# Altium PCB leo_pcb.PcbDoc (part 2 of 2)
Units mm, origin at the board's own origin, x right, y up, seen from the top; angles counter-clockwise.
Board outline 72.5 x 82 mm, 4 copper layers (TOP_Layer, INT1_GND, INT2_GND, BOTTOM_Layer), stack 1.586 mm thick; 90 components, 77 nets, 351 pads, 145 vias.
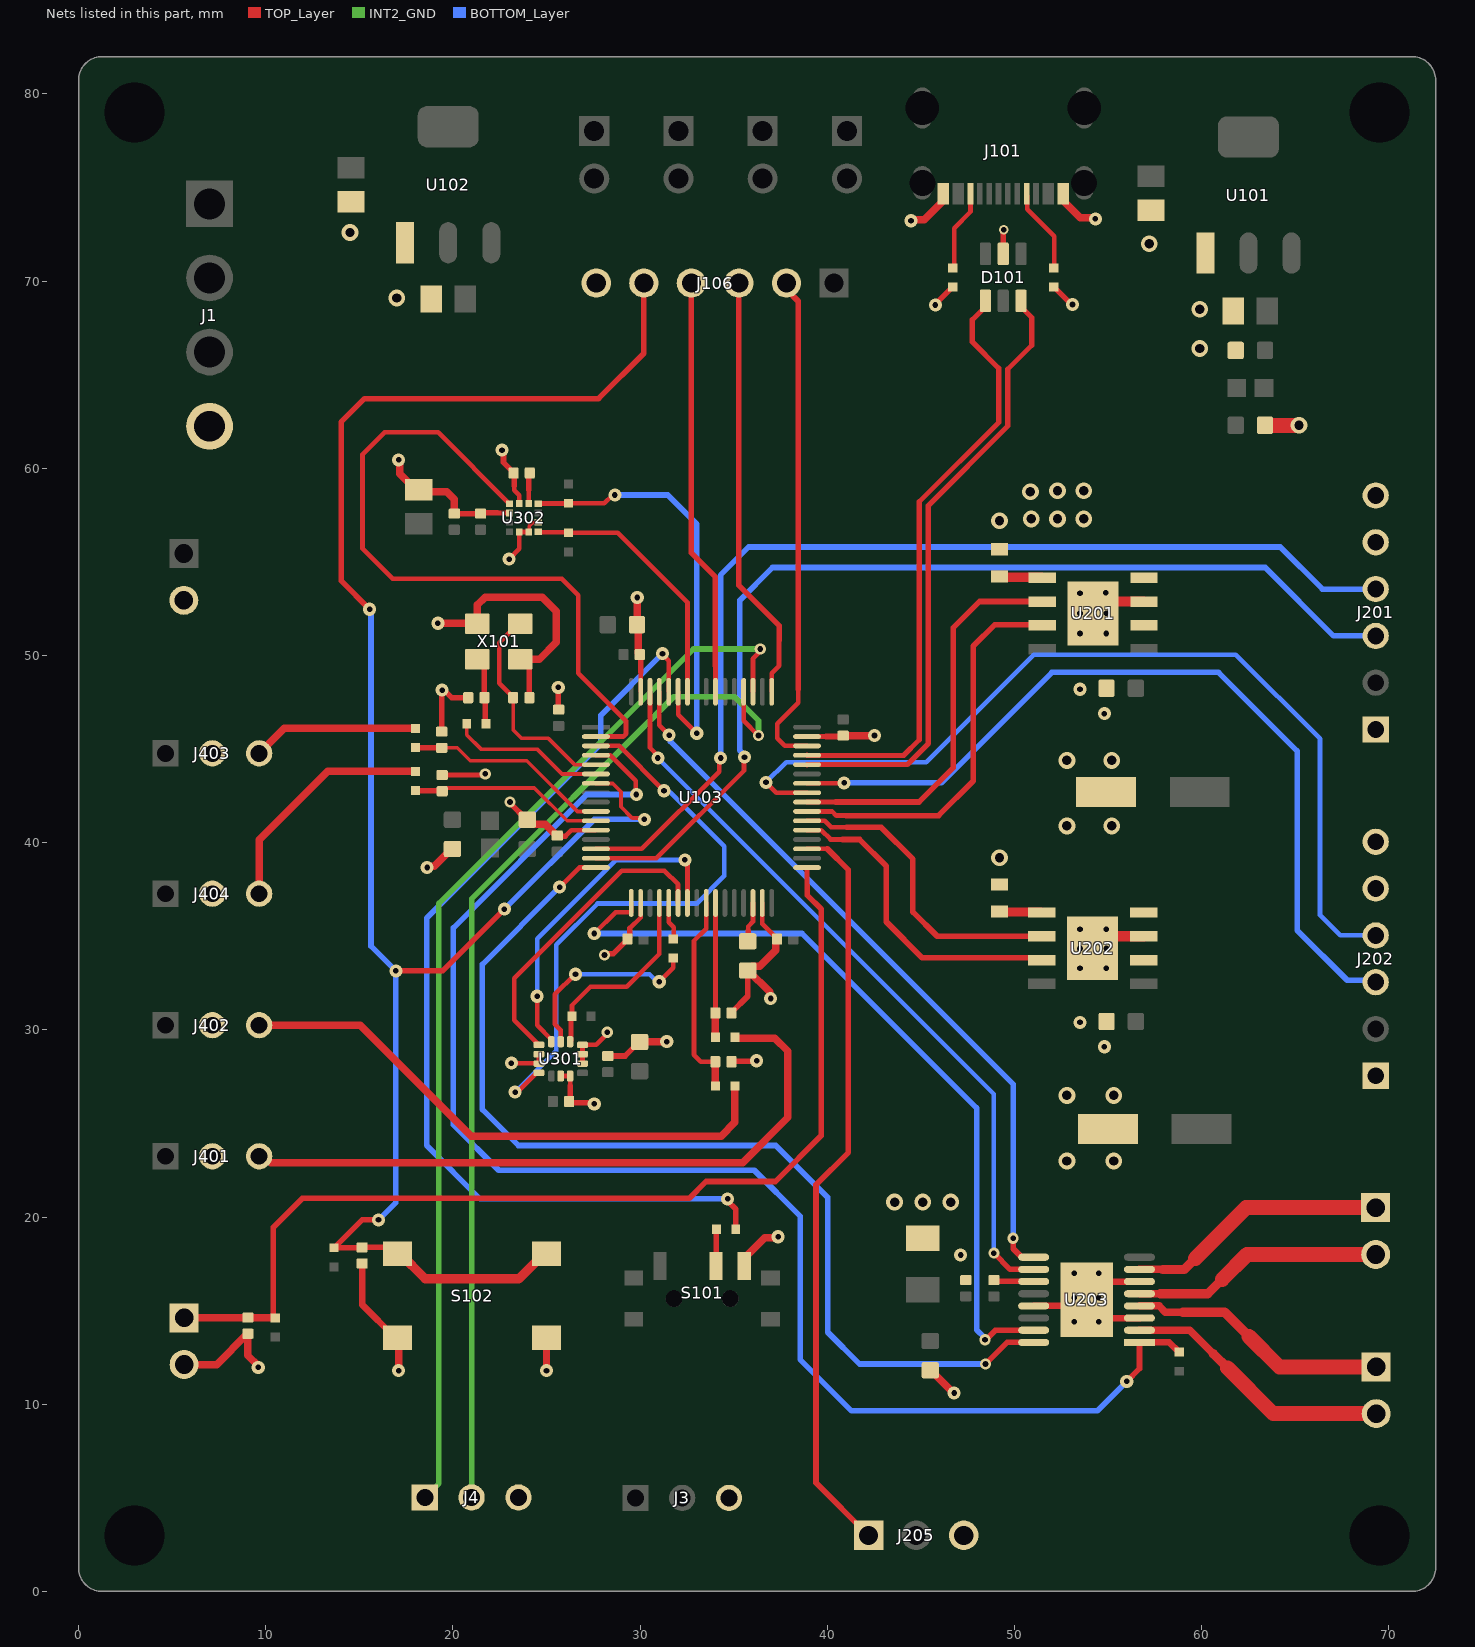
[diagram p4: the nets of this part, all layers, seen from the top]

## Via types
v1: diameter 0.7, hole 0.3, TOP_Layer to BOTTOM_Layer, 73 vias
v2: diameter 0.9, hole 0.5, TOP_Layer to BOTTOM_Layer, 38 vias
v3: diameter 0.6, hole 0.3, TOP_Layer to BOTTOM_Layer, 32 vias
v4: diameter 1, hole 0.6, TOP_Layer to BOTTOM_Layer, 1 vias
v5: diameter 0.5, hole 0.3, TOP_Layer to BOTTOM_Layer, 1 vias

## Nets (pads, with @x,y where several pads share a name; then routed paths per layer and width w, separated by ;. In a path a pad name is that pad's centre, name@x,y a point inside that pad or via, vN(x,y) a via of type N, cw(c..) or ccw(c..) an arc to the next point about the centre after c; other vN are vias at no path point) (continued)
GND: C1.1 C101.1 C102.1 C103.2 C104.2 C105.1 C106.1 C107.1 C108.2 C109.2 C110.1 C111.1 C112.1 C113.1 C114.1 C115.1 C116.1 C117.1 C118.1 C119.1 C201.2 C202.1 C203.2 C204.1 C205.2 C206.1 C208.1 C301.1 C302.1 C303.1 C304.1 C305.1 C306.2 C307.1 C401.1 C402.1 C403.1 C404.1 D101.2 J1.4 J2.2 J3.3 J4.3 J5.2 J101.A1B12 J101.B1A12 J106.6 J201.5 J202.5 J205.3 J401.2 J402.2 J403.2 J404.2 R101.2 R102.2 R201.1 R202.1 S101.3 S102.3 S102.4 U101.1 U102.1 U103.12 U103.18 U103.31 U103.47 U103.63 U201.7 U201.9 U202.7 U202.9 U203.3 U203.6 U203.13 U203.17 U301.2 U301.3 U301.6 U301.7 U301.9 U301.10 U301.11 U302.2 U302.6 U302.8 U302.11 U302.12 X101.2 X101.4 | length 122.5
  TOP_Layer w0.2: U302.12@24.047,56.602 24.072,56.627 24.072,56.913 24.248,57.089 24.535,57.089 U302.2@24.56,57.114
  TOP_Layer w0.25: C403.1@19.4,45.932 C403.1@19.412,45.945 ; v1@19.412,48.138 v1(19.425,48.15) ; C404.1@19.425,43.614 19.43,43.62 21.669,43.62 v3(21.725,43.675) ; 22.375,57.625 22.386,57.614 U302.8@23.035,57.614 ; v1(23,55.15) 23.547,55.697 U302.11@23.547,56.602 U302.12@24.047,56.602 ; v1(23.125,28.225) 23.136,28.214 24.583,28.214 U301.3@24.594,28.203 U301.2@24.594,28.703 ; 23.275,59.075 23.275,58.825 23.547,58.553 U302.6@23.547,58.127 ; U301.6@25.759,27.538 U301.7@26.259,27.538 26.275,27.522 26.275,27.025 ; 26,40.35 26.322,40.672 U103.12@27.639,40.672 ; U301.9@26.924,28.203 U301.10@26.924,28.703 U301.11@26.924,29.203 27.653,29.203 28.25,29.8 v3(28.25,29.875) ; C111.1@29.318,34.85 C111.1@29.45,34.982 ; 29.45,35.425 30.03,36.005 U103.18@30.03,36.78 ; U103.63@30.03,48.063 30.03,49.095 ; U103.31@36.53,36.781 36.53,35.662 C112.1@37.167,35.025 ; U103.47@38.921,45.672 39.947,45.672
  TOP_Layer w0.3: C403.1@19.412,45.945 v1@19.412,48.138 ; v1(19.425,48.15) 19.533,48.15 19.933,47.75 C105.1@20.818,47.75 ; C305.1@20.075,57.582 C304.1@21.475,57.582 21.518,57.625 22.375,57.625 ; v1(22.625,60.975) 22.702,60.898 22.702,60.321 23.243,59.78 C307.1@23.243,59.75 23.275,59.718 23.275,59.075 ; v3(23.05,42.175) 23.05,42.125 23.945,41.23 C118.1@23.975,41.23 ; X101.2@23.6,49.8 23.682,49.8 24.082,49.4 C106.1@24.082,47.75 ; C117.1@25.575,40.382 25.607,40.35 26,40.35 ; v1(25.625,48.3) 25.638,48.287 25.638,47.12 C110.1@25.65,47.107 ; 26.275,27.025 26.275,26.243 C303.1@26.207,26.175 26.27,26.113 27.487,26.113 v1(27.55,26.05) ; v3(28.1,34) 28.177,34.077 28.575,34.077 29.318,34.82 C111.1@29.318,34.85 ; C301.1@28.275,28.607 29.197,28.607 29.945,29.355 C302.1@29.975,29.355 ; C111.1@29.45,34.982 29.45,35.425 ; C114.1@29.982,50.05 30.03,50.002 30.03,49.095 ; C402.1@34.882,28.3 34.907,28.325 36.2,28.325 v1(36.225,28.35) ; C401.1@34.882,30.9 34.882,30.93 35.75,31.798 C116.1@35.75,33.17 ; 39.947,45.672 40.804,45.672 C113.1@40.85,45.718 C113.1@40.853,45.722 ; v1(45.775,68.725) 45.775,68.775 46.687,69.688 R101.2@46.7,69.688 ; D101.2@49.4,71.455 49.409,71.464 49.409,72.734 v5(49.419,72.744) ; R102.2@52.1,69.688 52.112,69.688 53.05,68.75 v1(53.1,68.75)
  TOP_Layer w0.35: C107.1@15.15,17.518 15.15,15.325 16.925,13.55 S102.3@17.05,13.55 ; U203.13@51.028,15.257 53.528,15.257 U203.17@53.853,15.582 ; U203.3@56.678,14.607 54.828,14.607 U203.17@53.853,15.582 ; U203.6@56.678,16.557 54.828,16.557 U203.17@53.853,15.582
  TOP_Layer w0.4: J5.2@5.642,12.121 7.373,12.121 9.02,13.768 C1.1@9.05,13.768 9.05,12.606 9.6,12.056 v1(9.6,11.975) ; S102.3@17.05,13.55 17.1,13.5 v1(17.1,11.8) ; v1(17.1,60.45) 17.157,60.393 17.157,59.718 18.025,58.85 C306.2@18.175,58.85 18.275,58.75 19.675,58.75 20.075,58.35 C305.1@20.075,57.582 ; v1(18.625,38.675) 18.682,38.732 19.007,38.732 19.945,39.67 C119.1@19.975,39.67 ; v1(19.2,51.725) 19.212,51.713 21.288,51.713 X101.4@21.3,51.7 21.3,52.7 21.725,53.125 24.775,53.125 25.525,52.375 25.525,50.7 24.625,49.8 X101.2@23.682,49.8 ; C118.1@23.975,41.23 24.21,40.995 24.932,40.995 25.545,40.382 C117.1@25.575,40.382 ; v1(25,11.8) S102.4@25,13.55 ; v1(29.85,53.1) 29.84,53.09 29.84,51.66 C115.1@29.83,51.65 29.912,51.568 29.912,50.12 C114.1@29.982,50.05 ; C302.1@29.975,29.355 29.985,29.365 31.415,29.365 v1(31.425,29.375) ; S101.3@35.565,17.393 35.565,17.793 36.665,18.893 37.318,18.893 v1(37.375,18.95) ; v1(36.975,31.675) 36.918,31.732 36.918,32.032 35.78,33.17 C116.1@35.75,33.17 35.982,33.402 36.402,33.402 37.248,34.248 37.248,34.78 C112.1@37.318,34.85 ; C113.1@40.853,45.722 42.521,45.722 v1(42.525,45.725) ; v1(44.475,73.225) 44.532,73.282 45.182,73.282 46.2,74.3 J101.B1A12@46.2,74.575 ; C208.1@45.5,11.82 45.53,11.82 46.75,10.6 v1(46.775,10.6) ; J101.A1B12@52.6,74.575 52.6,74.3 53.518,73.382 54.268,73.382 v1(54.325,73.325)
  TOP_Layer w0.55: U202.9@54.178,34.368 54.813,35.003 U202.7@56.902,35.003 ; U201.9@54.2,52.25 54.835,52.885 U201.7@56.924,52.885
  TOP_Layer w0.8: C101.1@63.38,62.3 v2(65.2,62.3)
  other v1: 47.125,17.975 54.8,29.1 53.5,30.4 54.8,46.9 53.5,48.2
  other v2: 43.6,20.8 45.1,20.8 46.6,20.8 52.8,23 55.3,23 52.8,26.5 55.3,26.5 49.2,39.2 52.8,40.9 55.2,40.9 52.8,44.4 55.2,44.4 49.2,57.2 50.9,57.3 52.3,57.3 53.7,57.3 50.85,58.75 52.3,58.8 53.7,58.8 59.9,66.4 59.9,68.5 17,69.1 57.2,72 14.5,72.6
  other v3: 53.2,14.4 54.5,14.4 53.2,15.7 54.5,15.7 53.2,17 54.5,17 53.5,33.3 54.9,33.3 53.5,34.35 54.9,34.35 53.5,35.375 54.9,35.375 53.5,51.175 54.9,51.175 53.5,52.25 54.9,52.25 53.5,53.325 54.875,53.35
ICM_INT: U103.3 U301.4 | length 31.6
  TOP_Layer w0.25: v1(23.325,26.675) 23.446,26.675 24.474,27.703 U301.4@24.594,27.703 ; U103.3@27.639,45.172 28.878,45.172 v1(31.275,42.775)
  BOTTOM_Layer w0.25: v1(23.325,26.675) 25.525,28.875 25.525,34.55 27.725,36.75 33.025,36.75 34.5,38.225 34.5,39.8 31.611,42.689 31.361,42.689 v1(31.275,42.775)
ICM_MISO: U103.22 U301.1 | length 16.5
  TOP_Layer w0.25: U301.1@24.594,29.203 23.275,30.522 23.275,32.75 29.025,38.5 31.3,38.5 32.03,37.77 U103.22@32.03,36.781
ICM_MOSI: U103.23 U301.14 | length 17.8
  TOP_Layer w0.25: v1(24.5,31.8) 24.5,30.247 25.259,29.488 U301.14@25.259,29.368 ; v1(32.389,39.086) 32.389,38.964 32.53,38.823 U103.23@32.53,36.781
  BOTTOM_Layer w0.25: v1(24.5,31.8) 24.5,34.875 28.7,39.075 32.379,39.075 v1(32.389,39.086)
ICM_NCS: R301.1 U103.20 U301.12 | length 10.5
  TOP_Layer w0.25: U301.12@26.259,29.368 26.309,29.418 26.309,30.671 R301.1@26.363,30.725 26.363,31.313 27.35,32.3 29.275,32.3 31.03,34.055 U103.20@31.03,36.781
ICM_SCLK: R106.2 U301.13 | length 10.4
  TOP_Layer w0.25: U301.13@25.759,29.368 25.759,29.991 25.45,30.3 25.45,31.9 26.525,32.975 v1(26.55,32.975) ; v1(31.025,32.575) 31.775,33.325 R106.2@31.775,33.838
  BOTTOM_Layer w0.25: v1(26.55,32.975) 30.503,32.975 30.903,32.575 v1(31.025,32.575)
ICM_SCLK_R: R106.1 U103.21 | length 2
  TOP_Layer w0.25: U103.21@31.53,36.781 31.53,35.745 31.8,35.475 31.8,34.887 R106.1@31.775,34.862
LDM_CURR_SEN: R201.2 U201.1 | length 2.3
  TOP_Layer w0.5: R201.2@49.2,54.225 49.241,54.184 51.446,54.184 U201.1@51.476,54.155
LDM_ENC_CHA: J201.4 U103.14 | length 55.4
  TOP_Layer w0.25: U103.14@27.639,39.672 30.097,39.672 34.225,43.8 34.225,44.45 v1(34.3,44.525)
  BOTTOM_Layer w0.3: v1(34.3,44.525) 34.3,54.3 35.8,55.8 64.2,55.8 66.45,53.55 J201.4@69.3,53.55
LDM_ENC_CHB: J201.3 U103.15 | length 55.3
  TOP_Layer w0.25: U103.15@27.639,39.172 30.872,39.172 35.55,43.85 35.55,44.55 v1(35.575,44.575)
  BOTTOM_Layer w0.3: v1(35.575,44.575) 35.575,44.683 35.325,44.933 35.325,52.95 37.075,54.7 63.4,54.7 67.05,51.05 J201.3@69.3,51.05
LDM_N: J201.6 U201.8
LDM_P: J201.1 U201.6
LDM_PWM_INA: U103.39 U201.3 | length 21.1
  TOP_Layer w0.25: U103.39@38.921,41.672 40.253,41.672 40.475,41.45 41,41.45
  TOP_Layer w0.3: 41,41.45 45.95,41.45 47.8,43.3 47.8,50.5 48.95,51.65 51.441,51.65 U201.3@51.476,51.615
LDM_PWM_INB: U103.40 U201.2 | length 21.4
  TOP_Layer w0.25: U103.40@38.921,42.172 40.447,42.172 40.45,42.175
  TOP_Layer w0.3: 40.45,42.175 44.9,42.175 46.725,44 46.725,51.475 48.135,52.885 U201.2@51.476,52.885
LSBM_N: J203.1 U203.4 | length 14
  TOP_Layer w0.35: U203.4@56.678,15.257 U203.4@56.684,15.251
  TOP_Layer w0.4: U203.4@56.684,15.251 57.724,15.251 58.05,14.925 59,14.925
  TOP_Layer w0.5: 59,14.925 61.225,14.925 62.525,13.625
  TOP_Layer w0.8: 62.525,13.625 64.15,12 J203.1@69.325,12
LSBM_P: J203.2 U203.2 | length 14.5
  TOP_Layer w0.4: U203.2@56.678,13.957 59.368,13.957 60.625,12.7
  TOP_Layer w0.5: 60.625,12.7 61.375,11.95
  TOP_Layer w0.8: 61.375,11.95 63.825,9.5 J203.2@69.325,9.5
LSBM_PWM_INA: U103.16 U203.16 | length 55.7
  TOP_Layer w0.25: v1(25.7,37.625) 26.747,38.672 U103.16@27.639,38.672
  TOP_Layer w0.3: v3(48.45,12.15) 49.607,13.307 U203.16@51.028,13.307
  BOTTOM_Layer w0.3: v1(25.7,37.625) 21.575,33.5 21.575,25.75 23.5,23.825 37.25,23.825 40.025,21.05 40.025,13.85 41.725,12.15 v3(48.45,12.15)
LSBM_PWM_INB: U103.17 U203.15 | length 42.6
  TOP_Layer w0.25: v1(27.55,35.15) 28.688,36.288 29.529,36.288 29.53,36.289 U103.17@29.53,36.781
  TOP_Layer w0.3: v3(48.425,13.45) 48.472,13.45 48.979,13.957 U203.15@51.028,13.957
  BOTTOM_Layer w0.3: v1(27.55,35.15) 38.65,35.15 47.975,25.825 47.975,13.981 48.425,13.531 v3(48.425,13.45)
MAG_C1: C307.2 U302.5 | length 1.6
  TOP_Layer w0.25: U302.5@24.047,58.127 24.047,58.847 24.05,58.85
  TOP_Layer w0.3: 24.05,58.85 24.05,59.693 C307.2@24.107,59.75
MAG_INT: U103.2 U302.7 | length 37.7
  TOP_Layer w0.25: U302.7@23.035,58.114 23.022,58.114 19.211,61.925 16.35,61.925 15.175,60.75 15.175,55.7 16.775,54.1 25.825,54.1 26.7,53.225 26.7,49.05 29.25,46.5 29.25,45.818 29.104,45.672 U103.2@27.639,45.672
MAG_SCL: R303.1 U103.58 U302.1 | length 14.3
  TOP_Layer w0.25: U302.1@24.56,56.614 24.586,56.588 26.149,56.588 R303.1@26.175,56.562 28.813,56.562 32.53,52.845 U103.58@32.53,48.063
MAG_SDA: R302.1 U103.59 U302.4 | length 23.1
  TOP_Layer w0.25: U302.4@24.56,58.114 24.572,58.126 26.163,58.126 R302.1@26.175,58.138 28.091,58.138 28.528,58.575 v1(28.65,58.575) ; U103.59@32.03,48.063 32.03,46.845 v1(33.025,45.85)
  BOTTOM_Layer w0.3: v1(28.65,58.575) 31.475,58.575 33.025,57.025 v1(33.025,45.85)
MCU_BOOT0: R103.2 U103.60 | length 52.7
  TOP_Layer w0.25: v1(31.2,50.1) 31.2,50.058 31.53,49.729 U103.60@31.53,48.063
  TOP_Layer w0.3: v1(34.675,20.975) 34.675,20.867 35.112,20.43 R103.2@35.112,19.35
  BOTTOM_Layer w0.3: v1(31.2,50.1) 27.9,46.8 27.9,45.275 18.6,35.975 18.6,23.825 21.45,20.975 v1(34.675,20.975)
MCU_BOOT0_R: R103.1 S101.2 | length 2
  TOP_Layer w0.3: S101.2@34.065,17.393 34.076,17.405 34.076,19.339 R103.1@34.088,19.35
MCU_NRST: C107.2 J106.5 R105.1 S102.1 S102.2 U103.7 | length 101.7
  TOP_Layer w0.2: U103.7@27.639,43.172 27.649,43.162 28.538,43.162 28.975,42.725 28.975,41.925 29.575,41.325 30.15,41.325 v1(30.225,41.25)
  TOP_Layer w0.3: R105.1@13.65,18.362 13.662,18.362 R105.1@13.672,18.372 ; v1(15.55,52.475) 14.025,54 14.025,62.475 15.275,63.725 27.775,63.725 30.2,66.15 J106.5@30.2,69.9 ; v1(16.025,19.85) 15.15,19.85 R105.1@13.672,18.372 ; v1(16.95,33.15) 19.45,33.15 v1(22.75,36.45) ; S102.1@17.05,18.05 16.718,18.382 C107.2@15.15,18.382 15.14,18.372 R105.1@13.672,18.372
  TOP_Layer w0.5: S102.1@17.05,18.05 17.175,18.05 18.525,16.7 23.525,16.7 24.875,18.05 S102.2@25,18.05
  BOTTOM_Layer w0.3: v1(15.55,52.475) 15.625,52.4 15.625,34.475 v1(16.95,33.15) 16.95,20.775 v1(16.025,19.85) ; v1(22.75,36.45) 27.55,41.25 v1(30.225,41.25)
MCU_OSC_IN: C106.2 U103.5 X101.3 | length 11.7
  TOP_Layer w0.2: C106.2@23.218,47.75 23.218,46.032 23.675,45.575 25.1,45.575 26.503,44.172 U103.5@27.639,44.172
  TOP_Layer w0.25: C106.2@23.218,47.75 23.218,47.78 22.475,48.523 22.475,50.675 23.5,51.7 X101.3@23.6,51.7
MCU_OSC_OUT: R104.2 U103.6 | length 8.4
  TOP_Layer w0.2: R104.2@20.738,46.35 20.738,45.762 21.5,45 24.5,45 25.828,43.672 U103.6@27.639,43.672
MCU_RX: J4.2 U103.52 | length 55.8
  TOP_Layer w0.25: U103.52@35.53,48.063 35.53,46.52 v3(36.325,45.725)
  INT2_GND w0.3: J4.2@21,5.025 21,37 31.8,47.8 35.05,47.8 36.325,46.525 v3(36.325,45.725)
MCU_SWCLK: J106.3 U103.49 | length 22.9
  TOP_Layer w0.25: U103.49@37.03,48.063 37.03,49.055 37.425,49.45 37.425,50.8
  TOP_Layer w0.3: J106.3@35.28,69.9 35.28,53.745 37.425,51.6 37.425,50.8
MCU_SWDIO: J106.2 U103.46 | length 26.8
  TOP_Layer w0.25: 38.45,48.207 38.45,47.475 37.325,46.35 37.325,45.575 37.728,45.172 U103.46@38.921,45.172
  TOP_Layer w0.3: J106.2@37.82,69.9 37.82,69.556 38.45,68.926 38.45,48.207
MCU_SWO: J106.4 U103.55 | length 22.4
  TOP_Layer w0.25: 34.025,49.45 34.03,49.445 U103.55@34.03,48.063
  TOP_Layer w0.3: J106.4@32.74,69.9 32.74,55.485 34.025,54.2 34.025,49.45
MCU_TX: J4.1 U103.51 | length 57.3
  TOP_Layer w0.25: U103.51@36.03,48.063 36.03,49.826 36.425,50.221 v3(36.425,50.35)
  INT2_GND w0.3: J4.1@18.5,5.025 19.25,5.775 19.25,36.75 32.85,50.35 v3(36.425,50.35)
MCU_VCAP_1: C116.2 U103.30 | length 2.2
  TOP_Layer w0.25: 35.775,35.3 35.775,35.525 36.03,35.78 U103.30@36.03,36.781
  TOP_Layer w0.3: C116.2@35.775,34.755 35.775,35.3
  TOP_Layer w0.4: C116.2@35.75,34.73 C116.2@35.775,34.755
RDM_CURR_SEN: R202.2 U202.1 | length 2.3
  TOP_Layer w0.5: R202.2@49.2,36.325 49.226,36.299 51.428,36.299 U202.1@51.454,36.273
RDM_ENC_CHA: J202.4 U103.41 | length 49.6
  TOP_Layer w0.25: v1(36.725,43.225) 37.278,42.672 U103.41@38.921,42.672
  BOTTOM_Layer w0.25: v1(36.725,43.225) 37.8,44.3 45.275,44.3 51.025,50.05 61.825,50.05 66.325,45.55 66.325,36.125 67.4,35.05 J202.4@69.3,35.05
RDM_ENC_CHB: J202.3 U103.42 | length 45.3
  TOP_Layer w0.25: U103.42@38.922,43.172 40.872,43.172 v1(40.9,43.2)
  BOTTOM_Layer w0.3: v1(40.9,43.2) 46.1,43.2 52,49.1 60.9,49.1 65.1,44.9 65.1,35.325 67.775,32.65 69.2,32.65 J202.3@69.3,32.55
RDM_N: J202.6 U202.8
RDM_P: J202.1 U202.6
RDM_PWM_INA: U103.37 U202.3 | length 17.1
  TOP_Layer w0.25: U103.37@38.921,40.672 39.678,40.672 40.175,40.175 40.825,40.175
  TOP_Layer w0.3: 40.825,40.175 41.725,40.175 43.15,38.75 43.15,35.775 45.075,33.85 51.337,33.85 U202.3@51.454,33.733
RDM_PWM_INB: U103.38 U202.2 | length 16.7
  TOP_Layer w0.25: U103.38@38.921,41.172 39.853,41.172 40.2,40.825 41.025,40.825
  TOP_Layer w0.3: 41.025,40.825 42.875,40.825 44.575,39.125 44.575,36.3 45.872,35.003 U202.2@51.454,35.003
RSBM_N: J204.2 U203.5 | length 13.5
  TOP_Layer w0.35: U203.5@56.678,15.907 U203.5@56.684,15.901 ; 57.799,15.901 57.8,15.9
  TOP_Layer w0.4: U203.5@56.684,15.901 57.799,15.901
  TOP_Layer w0.5: 57.8,15.9 60.325,15.9 61.1,16.675
  TOP_Layer w0.8: 61.1,16.675 62.425,18 J204.2@69.3,18
RSBM_P: J204.1 U203.7 | length 14
  TOP_Layer w0.35: 57.918,17.207 57.925,17.2
  TOP_Layer w0.4: U203.7@56.678,17.207 57.918,17.207
  TOP_Layer w0.5: 57.925,17.2 59.075,17.2 59.675,17.8
  TOP_Layer w0.8: 59.675,17.8 62.375,20.5 J204.1@69.3,20.5
RSBM_PWM_INA: U103.61 U203.9 | length 38.9
  TOP_Layer w0.25: U103.61@31.03,48.063 31.03,46.27 v1(31.55,45.75)
  TOP_Layer w0.3: v3(49.925,18.875) 49.937,18.863 49.937,18.31 50.39,17.857 U203.9@51.028,17.857
  BOTTOM_Layer w0.3: v1(31.55,45.75) 31.627,45.673 31.627,45.398 49.925,27.1 v3(49.925,18.875)
RSBM_PWM_INB: U103.62 U203.10 | length 40.1
  TOP_Layer w0.25: U103.62@30.53,48.063 30.53,45.067 30.95,44.647 v1(30.95,44.525)
  TOP_Layer w0.3: v3(48.9,18.075) 49.768,17.207 U203.10@51.028,17.207
  BOTTOM_Layer w0.25: v1(30.95,44.525) 48.9,26.575 v3(48.9,18.075)
SBM_MD_VVP: C207.1 U203.11 | length 2.2
  TOP_Layer w0.3: C207.1@48.9,16.632 48.96,16.572 51.012,16.572 U203.11@51.028,16.557
SBM_NSLEEP: R203.1 U103.4 U203.1 | length 78.8
  TOP_Layer w0.25: U103.4@27.639,44.672 28.395,44.672 29.767,43.3 29.767,42.608 v1(29.8,42.575)
  TOP_Layer w0.3: v1(56,11.225) 56.678,11.903 U203.1@56.678,13.307
  TOP_Layer w0.35: U203.1@56.678,13.307 58.267,13.307 58.787,12.787 R203.1@58.8,12.787
  BOTTOM_Layer w0.3: v1(29.8,42.575) 27.15,42.575 20.025,35.45 20.025,24.925 22.45,22.5 36.1,22.5 38.55,20.05 38.55,12.4 41.3,9.65 54.425,9.65 v1(56,11.225)
SIR_FILT_OUT1: C401.2 R401.2 U103.26 | length 7.2
  TOP_Layer w0.25: C401.2@34.018,30.9 34.03,30.912 U103.26@34.03,36.781
  TOP_Layer w0.4: C401.2@34.018,30.9 34.028,30.89 34.028,29.61 R401.2@34.038,29.6
SIR_FILT_OUT2: C402.2 R402.2 U103.25 | length 11
  TOP_Layer w0.25: U103.25@33.53,36.781 33.53,35.405 32.875,34.75 32.875,28.675 33.25,28.3 C402.2@34.018,28.3
  TOP_Layer w0.4: C402.2@34.018,28.3 34.028,28.29 34.028,27.01 R402.2@34.038,27
SIR_FILT_OUT3: C403.2 R403.2 U103.10 | length 11.1
  TOP_Layer w0.2: C403.2@19.4,45.068 20.232,45.068 20.925,44.375 23.95,44.375 26.653,41.672 U103.10@27.639,41.672
  TOP_Layer w0.3: R403.2@18,45.088 18.01,45.078 19.39,45.078 C403.2@19.4,45.068
SIR_FILT_OUT4: C404.2 R404.2 U103.11 | length 10.5
  TOP_Layer w0.2: C404.2@19.425,42.75 19.595,42.92 19.737,42.92 19.742,42.925 24.35,42.925 26.103,41.172 U103.11@27.639,41.172
  TOP_Layer w0.3: R404.2@18,42.788 18.019,42.769 19.406,42.769 C404.2@19.425,42.75
SIR_OUT1: J401.3 R401.1 | length 36.1
  TOP_Layer w0.4: J401.3@9.65,23.25 9.921,23.25 10.271,22.9 35.475,22.9 37.9,25.325 37.9,28.85 37.2,29.55 35.1,29.55 35.062,29.588 R401.1@35.062,29.6
SIR_OUT2: J402.3 R402.1 | length 30.1
  TOP_Layer w0.4: J402.3@9.65,30.25 15.05,30.25 20.975,24.325 34.325,24.325 35.062,25.062 R402.1@35.062,27
SIR_OUT3: J403.3 R403.1 | length 8.9
  TOP_Layer w0.4: J403.3@9.65,44.775 10.987,46.112 R403.1@18,46.112
SIR_OUT4: J404.3 R404.1 | length 12.7
  TOP_Layer w0.4: J404.3@9.65,37.275 9.65,40.15 13.312,43.812 R404.1@18,43.812
SW_MAIN: C1.2 J5.1 R1.1 U103.33 | length 55.7
  TOP_Layer w0.25: U103.33@38.921,38.672 38.921,37.729 38.925,37.725
  TOP_Layer w0.3: R1.1@10.5,14.612 10.487,14.612 10.477,14.622 10.4,14.7 10.4,19.45 11.95,21 32.625,21 33.525,21.9 37.225,21.9 39.675,24.35 39.675,36.45 38.925,37.2 38.925,37.725
  TOP_Layer w0.4: J5.1@5.642,14.621 5.653,14.632 C1.2@9.05,14.632 9.06,14.622 R1.1@10.477,14.622
USB_CC1: J101.A5 R102.1 | length 4.5
  TOP_Layer w0.25: J101.A5@50.65,74.575 50.675,74.55 50.675,73.85 52.125,72.4 52.125,70.737 R102.1@52.1,70.712
USB_CC2: J101.B5 R101.1 | length 4.3
  TOP_Layer w0.25: R101.1@46.7,70.712 46.775,70.787 46.775,72.825 47.65,73.7 J101.B5@47.65,74.575
USB_D_N: D101.6 U103.44 | length 33.1
  TOP_Layer w0.281: U103.44@38.921,44.172 38.929,44.18 44.28,44.18 45.4,45.299 45.4,58.015 49.642,62.257 49.642,65.292 50.925,66.575 50.925,68.06 50.35,68.635 D101.6@50.35,68.945
USB_D_P: D101.4 U103.45 | length 32.4
  TOP_Layer w0.281: U103.45@38.921,44.672 38.929,44.664 44.08,44.664 44.916,45.5 44.916,58.216 49.158,62.458 49.158,65.342 47.75,66.75 47.75,67.935 48.45,68.635 D101.4@48.45,68.945
VM_PWM: J205.1 U103.35 | length 40.1
  TOP_Layer w0.25: U103.35@38.921,39.672 39.997,39.672 40,39.675
  TOP_Layer w0.3: 40,39.675 41.125,38.55 41.125,23.45 39.4,21.725 39.4,5.81 J205.1@42.21,3
XTAL_IN: C105.2 R104.1 X101.1 | length 3.6
  TOP_Layer w0.3: X101.1@21.3,49.8 21.682,49.418 C105.2@21.682,47.75 21.722,47.71 21.722,46.39 R104.1@21.762,46.35
pads on no net: J101.A8 J101.B8 J101.S1 J101.S2 J101.S3 J101.S4 J205.2 S101. S101.SH1 S101.SH2 S101.SH3 S101.SH4 U103.8 U103.9 U103.24 U103.27 U103.34 U103.36 U103.43 U103.50 U103.53 U103.54 U103.56 U103.57 U203.8

## Polygon pours and split planes (outlines as drawn)
+3V3_USB on TOP_Layer "+3V3_USB_L01_P017" (solid, pour order 17): 60.5,75 61.9,73.6 61.9,70.4 63.1,70.4 63.1,73.9 64.4,75.2 64.4,78.85 63.55,79.7 56.9,79.7 56.5,79.3 56.5,75
+5V_VBUS on TOP_Layer "+5V_VBUS_L01_P023" (solid, pour order 23): 49.1,69.55 49.7,69.55 49.7,68.1 50.15,67.65 50.15,66.8 49.8,66.45 48.975,66.45 48.65,66.775 48.65,67.725 49.1,68.175
+5V_EXT on TOP_Layer "+5V_EXT_L01_P019" (solid, pour order 19): 21.5,73.2 21.5,70.6 20.8,69.9 20,69.9 20,66.8 23.7,66.8 24.5,67.6 24.5,70.2 22.6,72.1 22.6,73.2
GND on TOP_Layer "GND_L01_P004" (solid, pour order 4): 48.6,55.3 52.15,55.3 52.825,54.625 52.825,49.275 51.2,47.65 51.2,42.925 49.425,41.15 48,41.15 47.35,40.5 47.35,38.325 48.3,37.375 52.1,37.375 52.775,36.7 52.775,31.4 51.375,30 51.375,25.05 49.675,23.35 43.45,23.35 42.275,22.175 42.275,18.8 42.95,18.125 46.25,18.125 46.85,17.525 46.85,16.575 47.075,16.35 47.7,16.35 47.975,16.625 47.975,18.85 48.675,19.55 51.3,19.55 52.425,18.425 52.425,13.475 55.275,13.475 55.275,20.45 56.775,21.95 56.775,26.175 55.375,27.575 55.375,32 55.575,32.2 55.575,38.675 56.7,39.8 56.7,44.275 55.4,45.575 55.4,50.175 55.6,50.375 55.6,58.4 54,60 49,60 48.1,59.1 48.1,55.8
+5V_VBUS on TOP_Layer "+5V_VBUS_L01_P018" (solid, pour order 18): 62.4,64.8 62.4,61.9 61.9,61.4 59.5,61.4 58.9,62 58.9,64.2 59.5,64.8
+5V_USB on TOP_Layer "+5V_USB_L01_P016" (solid, pour order 16): 62.9,69.2 62.9,64.9 62.8,64.8 62.8,63.8 64.5,63.8 65.4,64.7 65.4,72.6 64.3,72.6 64.3,70.5
GND on TOP_Layer "GND_L01_P014" (solid, pour order 14): 56.6,74.4 58.3,74.4 58.6,74.1 58.6,73.2 59.1,72.7 60.6,72.7 60.8,72.5 60.8,69.7 61.3,69.2 62.3,69.2 62.3,65.9 62.1,65.7 59.1,65.7 58.3,66.5 56.6,68.2
GND on TOP_Layer "GND_L01_P011" (solid, pour order 11): 13.8,74.9 15.5,74.9 16,74.4 16,73.6 16.4,73.2 18,73.2 18,70.5 18.6,69.9 19.5,69.9 19.5,68.1 15.7,68.1 13.8,70
+3V3_EXT on TOP_Layer "+3V3_EXT_L01_P010" (solid, pour order 10): 13.7,75.4 17.9,75.4 19.2,74.1 19.2,70.9 20.3,70.9 20.3,74.2 21.8,75.7 21.8,79.2 21.125,79.875 14.775,79.875 13.7,78.8
+5V_VBUS on TOP_Layer "+5V_VBUS_L01_P009" (solid, pour order 9): 47.25,74 47.25,75.825 47.95,76.525 50.975,76.525 51.55,75.95 51.55,74 52.05,74 52.05,76.85 51.35,77.55 47.65,77.55 46.75,76.65 46.75,74
+6V_EXT on TOP_Layer "+6V_EXT_L01_P002" (solid, pour order 2): 51.85,16.1 46.8,16.1 46.025,17.025 41.925,17.025 41.3,16.4 41.3,14.6 42.1,13.8 44.3,13.8 45.9,15.4 49.775,15.4 50.1,15.725 51.85,15.725
RDM_P on TOP_Layer "RDM_P_L01_P008" (solid, pour order 8): 56.175,34.1 62.25,34.1 67.8,28.55 70.5,28.55 71.225,27.825 71.225,26.525 70.525,25.825 67.325,25.825 59.95,33.2 57.9,33.2 57.65,33.45 56.175,33.45
RDM_N on TOP_Layer "RDM_N_L01_P007" (solid, pour order 7): 56.175,36.6 61.975,36.6 67,41.625 70.625,41.625 71.275,40.975 71.275,39.375 70.775,38.875 67.275,38.875 63.775,35.375 58.2,35.375 57.6,35.975 56.175,35.975
LDM_P on TOP_Layer "LDM_P_L01_P006" (solid, pour order 6): 56.2,51.975 62,51.975 66.8,47.175 70.55,47.175 71.4,46.325 71.4,45.025 70.7,44.325 66.425,44.325 59.675,51.075 57.85,51.075 57.6,51.325 56.2,51.325
LDM_N on TOP_Layer "LDM_N_L01_P005" (solid, pour order 5): 56.2,54.55 60.7,54.55 66.325,60.175 70.625,60.175 70.625,60.15 71.2,59.575 71.2,58.025 70.6,57.425 66.875,57.425 62.875,53.425 58.1,53.425 57.65,53.875 56.2,53.875
+12V_EXT on TOP_Layer "+12V_EXT_L01_P001" (solid, pour order 1): 56.175,32.8 57.775,32.8 58.125,32.45 58.125,29.85 59.725,28.25 61.625,28.25 62.5,27.375 62.5,22.7 61.925,22.125 58.675,22.125 57.975,22.825 57.975,26.675 56,28.65 56,32.65
+12V_EXT on TOP_Layer "+12V_EXT_L01_P000" (solid, pour order 0): 56.2,50.675 57.75,50.675 58.45,49.975 58.45,47.25 59.625,46.075 61.475,46.075 62.3,45.25 62.3,40.45 61.85,40 58.45,40 57.85,40.6 57.85,44.85 55.975,46.725 55.975,50.54
GND on BOTTOM_Layer "GND_L04_P026" (solid, remove dead copper, pour order 26): 1.25,81.5 71.25,81.5 71.25,0.5 1.25,0.5
+12V_EXT on BOTTOM_Layer "+12V_EXT_L04_P020" (solid, pour order 20): 58.9,45.6 61.9,45.6 62.8,44.7 62.8,6.2 57.2,0.6 6.9,0.6 1,6.5 1,74.1 3.1,76.2 8.5,76.2 9.6,75.1 9.6,73 9,72.4 5.4,72.4 3.4,70.4 3.4,10.6 10.3,3.7 38,3.7 42.2,7.9 54.3,7.9 57.8,11.4 57.8,44.5
GND on INT2_GND "GND_L03_P029" (solid, remove dead copper, pour order 29): 1.25,81.5 71.25,81.5 71.25,0.5 1.25,0.5
+6V_EXT on INT2_GND "+6V_EXT_L03_P028" (solid, pour order 28): 41.9,13.8 44.3,13.8 44.9,14.4 44.9,16.8 44.1,17.6 41.7,17.6 41,16.9 41,14.6
GND on INT1_GND "GND_L02_P024" (solid, remove dead copper, pour order 24): 1.25,81.5 1.25,0.5 71.25,0.5 71.25,81.5

## Silkscreen, mask and mechanical layers (free items; w line width, h text height)
Top Overlay:
  lines w0.2: 64.25,6.25 65.25,6.25 ; 64.25,23.75 65.25,23.75 ; 64.75,5.75 64.75,6.75 ; 64.75,23.25 64.75,24.25
  text "12" at 11.45,73.7 h1.1
  text "EXT" at 25.95,72.2 h1.1
  text "RPI" at 30.45,72.2 h1.1
  text "DBG" at 34.95,72.2 h1.1
  text "USB" at 39.45,72.2 h1.1
  text "DEBUG" at 43,71.25 h1.5 r270
  text "PWR" at 13.5,70.25 h1.5 r270
  text "6" at 11.45,69.7 h1.1
  text "5" at 11.45,65.7 h1.1
  text "GND" at 28.3,64.95 h1.1 r90
  text "SWO" at 33.3,64.95 h1.1 r90
  text "SCK" at 35.8,64.95 h1.1 r90
  text "3V3" at 41.05,64.95 h1.1 r90
  text "NRST" at 30.8,63.95 h1.1 r90
  text "SDIO" at 38.55,63.95 h1.1 r90
  text "G" at 11.45,61.7 h1.1
  text "-" at 65.05,59.1 h1.1 r180
  text "3V3" at 8.7,57.55 h1.1 r270
  text "RPI" at 11,56 h1.5 r270
  text "G" at 65.05,55.7 h1.1 r90
  text "G" at 8.7,53.3 h1.1 r270
  text "ENA" at 62.2,52.95 h1.1
  text "LDM" at 61,50.5 h1.5 r90
  text "ENB" at 62.2,50.45 h1.1
  text "3V3" at 62.2,47.95 h1.1
  text "5" at 3.95,47.7 h1.1
  text "GND" at 5.7,47.7 h1.1
  text "OUT" at 10.8,47.7 h1.1 r90
  text "+" at 64.2,45.267 h1.1
  text "SIR3" at 14.5,41.5 h1.5 r90
  text "SIR4" at 14.5,34.25 h1.5 r90
  text "RDM" at 64.75,31.75 h1.5 r90
  text "SIR2" at 14.5,27.25 h1.5 r90
  text "SIR1" at 14.5,20.5 h1.5 r90
  text "BOOT0" at 26.5,20.5 h1.5
  text "NRST" at 18.5,19.75 h1.5
  text "RSBM" at 65,16.5 h1.5 r90
  text "SW" at 8.7,15.7 h1.1
  text "1" at 27.95,15.2 h1.1
  text "0" at 38.2,15.2 h1.1
  text "UART" at 18.5,10 h1.5
  text "BMI2C" at 29,10 h1.5
  text "GND" at 8.7,9.7 h1.1
  text "LSBM" at 65,8 h1.5 r90
  text "TX" at 16.95,7.95 h1.1
  text "RX" at 19.95,7.95 h1.1
  text "GND" at 22.7,7.95 h1.1
  text "SC" at 28.45,7.95 h1.1
  text "SD" at 31.2,7.95 h1.1
  text "GND" at 33.95,7.95 h1.1
  text "MSW" at 3,7.25 h1.5
  text "VMOTOR" at 40.5,7 h1.5
  text "PWM" at 40.7,4.95 h1.1
  text "GND" at 45.7,4.95 h1.1
  text "LEOv1" at 50.5,2.25 h3
Mechanical 1:
  lines w0.2: 0,1.27 ccw(c1.27,1.27) 1.27,0 71.23,0 ccw(c71.23,1.27) 72.5,1.27 72.5,80.73 ccw(c71.23,80.73) 71.23,82 4.5,82 1.27,82 ccw(c1.27,80.73) 0,80.73 0,1.27
Board Shape:
  lines w0.2: 0,1.27 ccw(c1.27,1.27) 1.27,0 71.23,0 ccw(c71.23,1.27) 72.5,1.27 72.5,80.73 ccw(c71.23,80.73) 71.23,82 7,82 1.27,82 ccw(c1.27,80.73) 0,80.73 0,2.5 0,1.27

## Text inside footprints (layer, text, board x,y; h text height)
U201: Top 3D Body "*" at 52.27,53.406 h1.27
U202: Top 3D Body "*" at 52.248,35.524 h1.27